# Altium PCB ESP32 with USBC PCB V1.PcbDoc (part 2 of 3)
Units mil, origin at the board's own origin, x right, y up, seen from the top; angles counter-clockwise.
Board outline 2800 x 1000 mil, 4 copper layers (L1, L2, L3, L4), stack 61.583 mil thick; 64 components, 73 nets, 299 pads, 158 vias.
Unrouted connection lines stored in the file: 2.
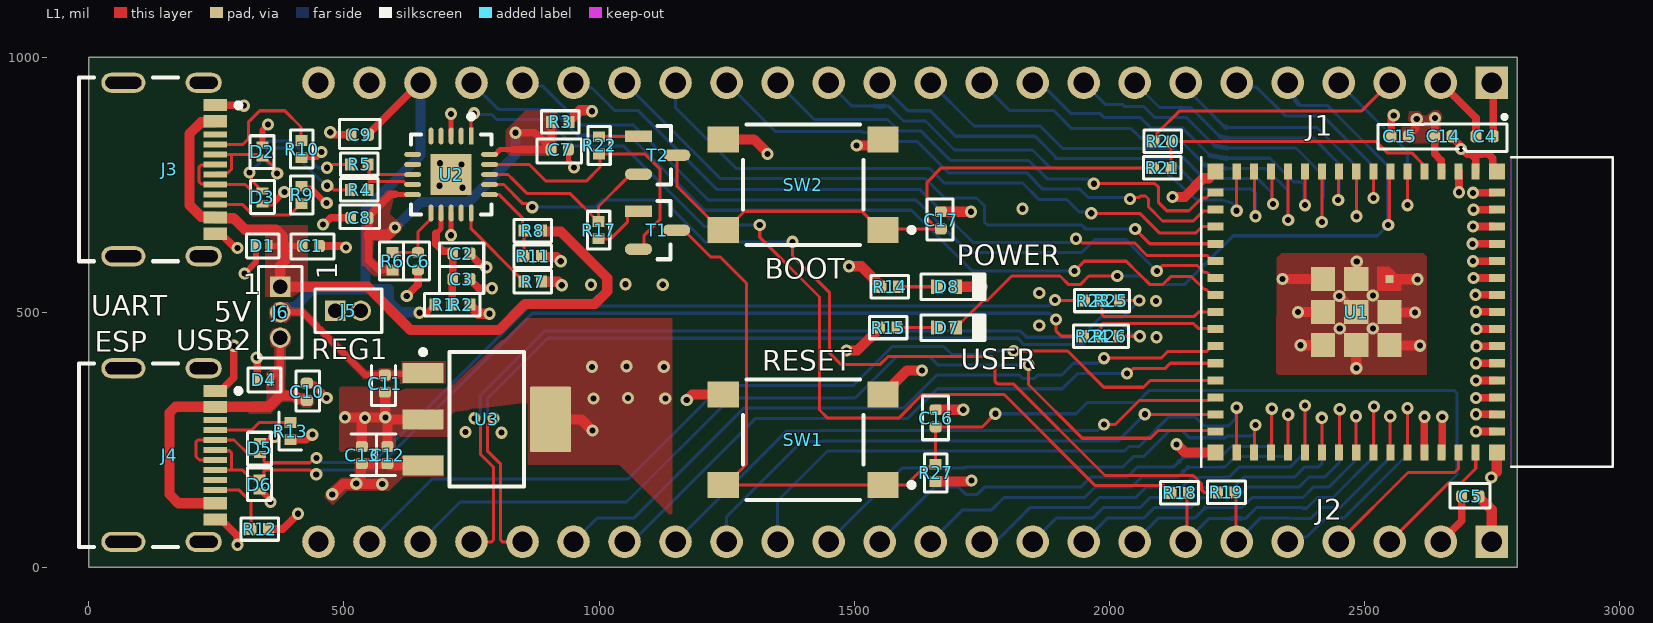
[diagram p0: L1 view]

## Part data (continued)
U3: "IC REG LINEAR 3.3V 1.5A SOT223-4", Case/Package=SOP, Dropout Voltage1-Max=550mV, Dropout Voltage1-Nom=340mV, Input Voltage Absolute-Max=20V, LCSC Part Number=C181262, Manufacturer="Texas Instruments", Min Input Voltage=3.8V, Operating Temperature, TJ-Max=125°C, Operating Temperature, TJ-Min=-40°C, Output Current1-Max=1.5A, Output Voltage1-Max=3.4V, Output Voltage1-Min=3.2V, Output Voltage1-Nom=3.3V, Package Body Material=Plastic, Package Shape=Rectangular, Package Style="SMALL OUTLINEMeter", Peak Reflow Temperature (Cel)=260°C, Supplier Part Number=296-24897-1-ND, Voltage Tolerance-Max=3%, Adjustability=FIXED, Category="Voltage Regulators - Linear", Channels=1, ComponentLink1Description=https://www.ti.com:443/lit/ds/symlink/tl1963a.pdf?src-supplier=IHS+Markit, ComponentLink1URL=https://www.ti.com:443/lit/ds/symlink/tl1963a.pdf?src-supplier=IHS+Markit, ComponentLink2Description=https://datasheet.ciiva.com/2046/-2046068.pdf?src-supplier=Digikey, ComponentLink2URL=https://datasheet.ciiva.com/2046/-2046068.pdf?src-supplier=Digikey, Height - Seated (Max)=1.8mm, JESD-30 Code=R-PDSO-G4, JESD-609 Code=e3, Length=6.5mm, Line Regulation-Max=0.01%, Load Regulation-Max=0.07%, Manufacturer Part Number=TL1963A-33DCYR, Max Supply Voltage=20V, Moisture Sensitivity Level=2, Number of Outputs=1, Packaging="Tape and Reel", Pins=4, Pricing="1=2.87, 10=2.578, 25=2.4368, 100=2.112, 250=2.00368, 500=1.79788, 1000=1.51629 (USD)", Qualification Status="Not Qualified", Reach SVHC Compliant=Yes, Regulator Type="FIXED POSITIVE SINGLE OUTPUT LDO REGULATOR", RoHS=Yes, RoHS Compliant=Yes, Stock=2673, Supplier=Digikey, Surface Mount=Yes, Technology=BIPOLAR, Terminal Finish=Tin, Terminal Form="Gull Wing", Terminal Pitch=2.3mm, Terminal Position=DUAL, Width=3.5mm

## Via types
v1: diameter 24, hole 12, L1 to L4, tented both sides, 158 vias

## Nets (pads, with @x,y where several pads share a name; then routed paths per layer and width w, separated by ;. In a path a pad name is that pad's centre, name@x,y a point inside that pad or via, vN(x,y) a via of type N, cw(c..) or ccw(c..) an arc to the next point about the centre after c; other vN are vias at no path point)
3.3V_REG: C12.2 C13.2 J5.1 U3.3 | length 735.2
  L1 w20: v1(477,143) 478.08,143 498.32,163.23 523.23,163.23 v1(524,164) 524.5,163.5 574.5,163.5 v1(575,163) ; 533.19,174.27 533.19,202.44 533.82,203.07 C13.2@535,203.07 C12.2@585,203.07 586.18,203.07 589.8,199.45 U3.3@655,199.45
  L2 w40: J5.1@483,503 483,482.29 522.29,443 532,443
  L2 w60: 532,443 655,320 655,198.15 619.85,163 v1(575,163)
+3V3: C4.2 C5.2 C14.2 C15.2 J1.2 J2.1 J5.2 R2.1 R3.1 R14.2 R15.2 R27.2 U1.3 | length 6052.9
  L1 w15: C15.2@2586.93,845 2586.93,846.18 2601.28,860.53 2601.28,877.28 v1(2603,879) ; v1(2639,881) 2638.54,880.54 2638.54,845.46 C14.2@2638.07,845 2638.07,810.69 2651.36,797.4 2651.36,776.36 U1.3@2651.73,775.98 ; J1.2@2650,950 2719.07,880.93 C4.2@2719.07,845
  L1 w20: R2.1@747.01,515 747.01,513.82 763.83,497 v1(785,497) ; R3.1@941.02,873 941.65,873.63 941.65,874.81 962.83,896 982.92,896 984.92,894 v1(986,894) ; v1(1485,425) 1506.18,425 1550,468.82 R15.2@1550,470 ; v1(1490,590) 1514.17,590 1552.99,551.18 R14.2@1552.99,550 ; R27.2@1661.18,167.99 1726.91,167.99 1728.92,170 v1(1730,170) ; C5.2@2724.93,139 2724.93,137.82 2750,112.75 J2.1@2750,50
  L2 w15: v1(2603,879) 2604.72,880.72 2638.72,880.72 v1(2639,881)
  L2 w20: J5.2@533,503 538.41,503 548.41,493 593,493 619,467 755,467 v1(785,497) ; 1419,869 1419,491 v1(1485,425) 1729.23,180.77 1729.23,170.77 v1(1730,170) ; 1477.86,869 1473,864.14 1473,607 v1(1490,590) ; 2685,778 2674.14,767.14 2672.6,767.14 2651,745.54 2651,585.03 2685,551.03 2685,115 J2.1@2750,50
  L2 w40: v1(785,497) 832.3,449.7 1251.27,449.7 1274.7,473.14 1274.7,605.3 v1(986,894) 1018.32,894 1043.32,869 1419,869 1477.86,869 1912.4,869 2003.4,778 2685,778 2707.4,778 2751.83,822.43 2751.83,855.57 2723.4,884 2642,884 2645.41,887.41 2645.41,945.41 J1.2@2650,950
+3V3_FTDI: C7.2 C8.2 R3.2 R6.1 U2.10 U2.20 | length 905.5
  L1 w10.01: 600,731 600.37,730.63 U2.10@634.59,730.63 ; U2.20@785.41,809.37 796.71,809.37 796.94,809.6 796.94,809.94 806,819 832,819
  L1 w15: R6.1@595,582.99 568.01,582.99 547.96,603.04 547.96,652 547.96,683.96 C8.2@546.93,685 546.93,686.18 591.75,731 600,731 ; 832,819 C7.2@906.07,819 ; v1(836,852) 874.25,852 902.94,823.31 902.94,822.13 C7.2@906.07,819 ; R3.2@907,873 906.54,872.54 906.54,819.46 C7.2@906.07,819
  L1 w20: 547.96,652 586.28,652 600,665.72 v1(600,666)
  L4 w20: v1(600,666) 610,676 650,716 743.6,716 836,808.4 v1(836,852)
+5V: C9.2 C11.2 J1.22 J6.2 R1.1 U3.1 | length 1288.9
  L1 w12: J6.2@375,500 419.16,500 542.23,376.93 C11.2@580,376.93 581.81,378.74 653.19,378.74 U3.1@655,380.55 ; v1(648,499) 661.99,499 672.18,509.19 673.36,509.19 677.99,513.82 R1.1@677.99,515
  L1 w15: C9.2@547.93,848 547.93,849.18 648.75,950 J1.22@650,950
  L4 w20: J6.2@375,500 380.41,500 390.41,510 403.28,510 438.28,545 542,545 ; v1(648,499) 647.23,499.77 644.41,499.77 644.17,500 609.75,500 588,521.75 588,545 542,545 ; J1.22@650,950 650,888 650,808 610,768 542,700 542,545
+5V_VBUS1: C1.2 D1.1 J3.A4B9 J3.B4A9 J6.1 R8.2 | length 1481.2
  L1 w12: D1.1@352.8,630 385.43,630 C1.2@418.07,630
  L1 w20: J3.A4B9@247.64,874.41 245.83,872.6 220.25,872.6 196.97,849.32 196.97,710.52 220.25,687.24 245.83,687.24 248.61,684.46 283.54,684.46 306.19,661.81 366.87,661.81 380,648.69 380,635.43 385.43,630 385.43,601.43 375,591 J6.1@375,550 546,550 631,465 804,465 855.37,516.37 991.63,516.37 1016,540.75 1016,567.25 925.07,658.19 887.64,658.19 887.01,658.82 R8.2@887.01,660
+5V_VBUS2: C10.2 D4.1 J4.A4B9 J4.B4A9 J6.3 | length 687.8
  L1 w15: D4.1@355.8,368 355.8,371.7 375,390.91 ; 375,337 375,390.91 ; J6.3@375,450 375,390.91 ; C10.2@423.87,330.27 C10.2@427,327.14
  L1 w20: J4.B4A9@247.64,125.59 175.41,125.59 158,143 158,302.85 169.72,314.57 J4.A4B9@247.64,314.57 352.57,314.57 375,337 403.58,337 410.21,330.37 423.77,330.37 C10.2@423.87,330.27
+VCC_FTDI: C2.2 C3.2 R1.2 R2.2 U2.12 | length 207.3
  L1 w10.01: 680.5,655 681.47,655 690.32,663.85 U2.12@690.32,694.59
  L1 w15: 680.5,655 680.5,633.09 694.28,619.31 709.94,619.31 713.07,616.18 C2.2@713.07,615 C3.2@713.07,565 712.54,564.47 712.54,515.53 R1.2@712.01,515
"BTN GPIO0": C17.2 R21.1 SW2.1 SW2.2 T2.3 | length 1207
  L1 w6: T2.3@1152.42,808 1152.42,747.58 1238.58,661.42 SW2.2@1243.5,661.42 1248.43,661.42 1285.01,698 1514.99,698 1551.57,661.42 SW2.1@1556.5,661.42 1558.15,663.07 1665.24,663.07 C17.2@1670,663.07 1668.48,663.07 1660.26,671.29 1655.27,671.29 1643.18,683.38 1643.18,755.08 1671.11,783 R21.1@2086.99,783
CHIP_PU: C16.1 J2.3 R27.1 SW1.1 SW1.2 T1.3 U1.45 | length 2758.2
  L1 w6: T1.3@1152,661 1166.61,661 1219.61,608 1238.14,608 1289.02,557.13 1289.02,202.01 SW1.2@1248.43,161.42 ; SW1.2@1243.5,161.42 SW1.2@1248.43,161.42 ; C16.1@1658.82,275.07 C16.1@1660,275.07 1750.94,275.07 v1(1776.87,301) ; C16.1@1660,273.89 R27.1@1660,202.01 1654.37,196.38 1636.97,196.38 1602.01,161.42 SW1.1@1556.5,161.42 SW1.2@1248.43,161.42 ; J2.3@2550,50 2665.81,165.81 2690.84,165.81 2718.66,193.63 U1.45@2718.66,224.8
  L4 w6: v1(1776.87,301) 1935,301 1957,323 2054.82,323 2078.82,347 2676,347 2682,341 2682,182 J2.3@2550,50
CON1_USB_N: D2.1 J3.A7 J3.B7 R4.1 | length 459.9
  L1 w6.03: J3.A7@247.64,770.08 250.53,772.97 272.14,772.97 279.29,780.12 279.29,809.16 279,809.45 ; J3.B7@247.64,809.45 279,809.45 ; v1(369,772) 365.56,775.44 365.56,781.56 344.92,802.2 D2.1@340,802.2 335.08,802.2 327.83,809.45 279,809.45 ; v1(467,748) 471.86,748 479.86,740 R4.1@512.99,740
  L4 w6.03: v1(369,772) 369,773 349.01,792.99 349.01,818.47 352.55,822 390.47,822 443.31,769.16 443.9,769.16 465.06,748 v1(467,748)
CON1_USB_P: D3.1 J3.A6 J3.B6 R5.1 | length 505.6
  L1 w6.03: J3.A6@247.64,789.76 246.48,788.61 219.52,788.61 215.99,785.08 215.99,755.31 219.63,751.66 246.37,751.66 J3.B6@247.64,750.39 306.61,750.39 319,738 D3.1@334.87,738 ; v1(315,774) 318.44,770.56 318.44,759.36 331.2,746.59 331.2,741.67 D3.1@334.87,738 ; D3.1@340,737.8 335.08,737.8 D3.1@334.87,738 ; v1(466.81,783.19) 471.67,783.19 478.49,790 R5.1@512.99,790
  L4 w6.03: v1(315,774) 316,774 334.99,792.99 334.99,824.28 346.74,836.03 396.28,836.03 449.12,783.19 v1(466.81,783.19)
CON2_USB_N: D5.1 J4.A7 J4.B7 R23.1 | length 1976.5
  L1 w6.03: J4.A7@247.64,210.24 216.76,210.24 210,217 210,246.07 213.53,249.61 J4.B7@247.64,249.61 284.37,249.61 312.97,221 D5.1@335,221 338.92,221 342.8,217.13 342.8,208.56 346.33,205.03 433.48,205.03 442.67,214.21 v1(446,214.21) ; v1(1894,524) 1895,523 R23.1@1951.98,523
  L4 w6.03: v1(446,214.21) 449.41,214.21 458.52,205.1 556.1,205.1 863.01,512.01 1881.48,512.01 1893.47,524 v1(1894,524)
CON2_USB_P: D6.1 J4.A6 J4.B6 R24.1 | length 1955.1
  L1 w6.03: J4.B6@247.64,190.55 279,190.55 ; J4.A6@247.64,229.92 249.08,228.48 275.47,228.48 279.29,224.65 279.29,190.84 279,190.55 ; v1(445.69,182.21) 441.96,182.21 433.17,191 346.33,191 342.8,187.47 342.8,178.87 338.92,175 D6.1@334,175 333.68,175.32 316.68,175.32 301.45,190.55 279,190.55 ; v1(1896,486) 1896,462.86 1905.86,453 R24.1@1949.98,453
  L4 w6.03: v1(445.69,182.21) 449.35,182.21 458.21,191.07 561.91,191.07 868.83,497.99 1883.48,497.99 1895.47,486 v1(1896,486)
"CON GPIO0": J1.3 R20.1 | length 515.3
  L1 w6: R20.1@2087.99,835 2093.62,840.63 2093.62,850.27 2138.32,894.97 2494.97,894.97 J1.3@2550,950
CON_ESP_USB_N: J2.21 R25.1 | length 1759.1
  L1 w6.03: J2.21@750,50 789.45,50 792.99,53.53 792.99,196.17 767.49,221.67 767.49,279.48 756,290.97 v1(756,292) ; R25.1@2020.02,523 v1(2059,523)
  L4 w6.03: v1@766.97,294.03 766.97,336.81 893.2,463.05 1826.34,463.05 1838.4,450.99 1943.99,450.99 1984.03,491.03 2027.03,491.03 v1(2059,523)